# Altium PCB Fei-Fei.PcbDoc
Units mm, origin at the board's own origin, x right, y up, seen from the top; angles counter-clockwise.
Board outline 50 x 50 mm, 2 copper layers (Top Layer, Bottom Layer), stack 1.664 mm thick; 12 components, 6 nets, 41 pads, 1 vias.
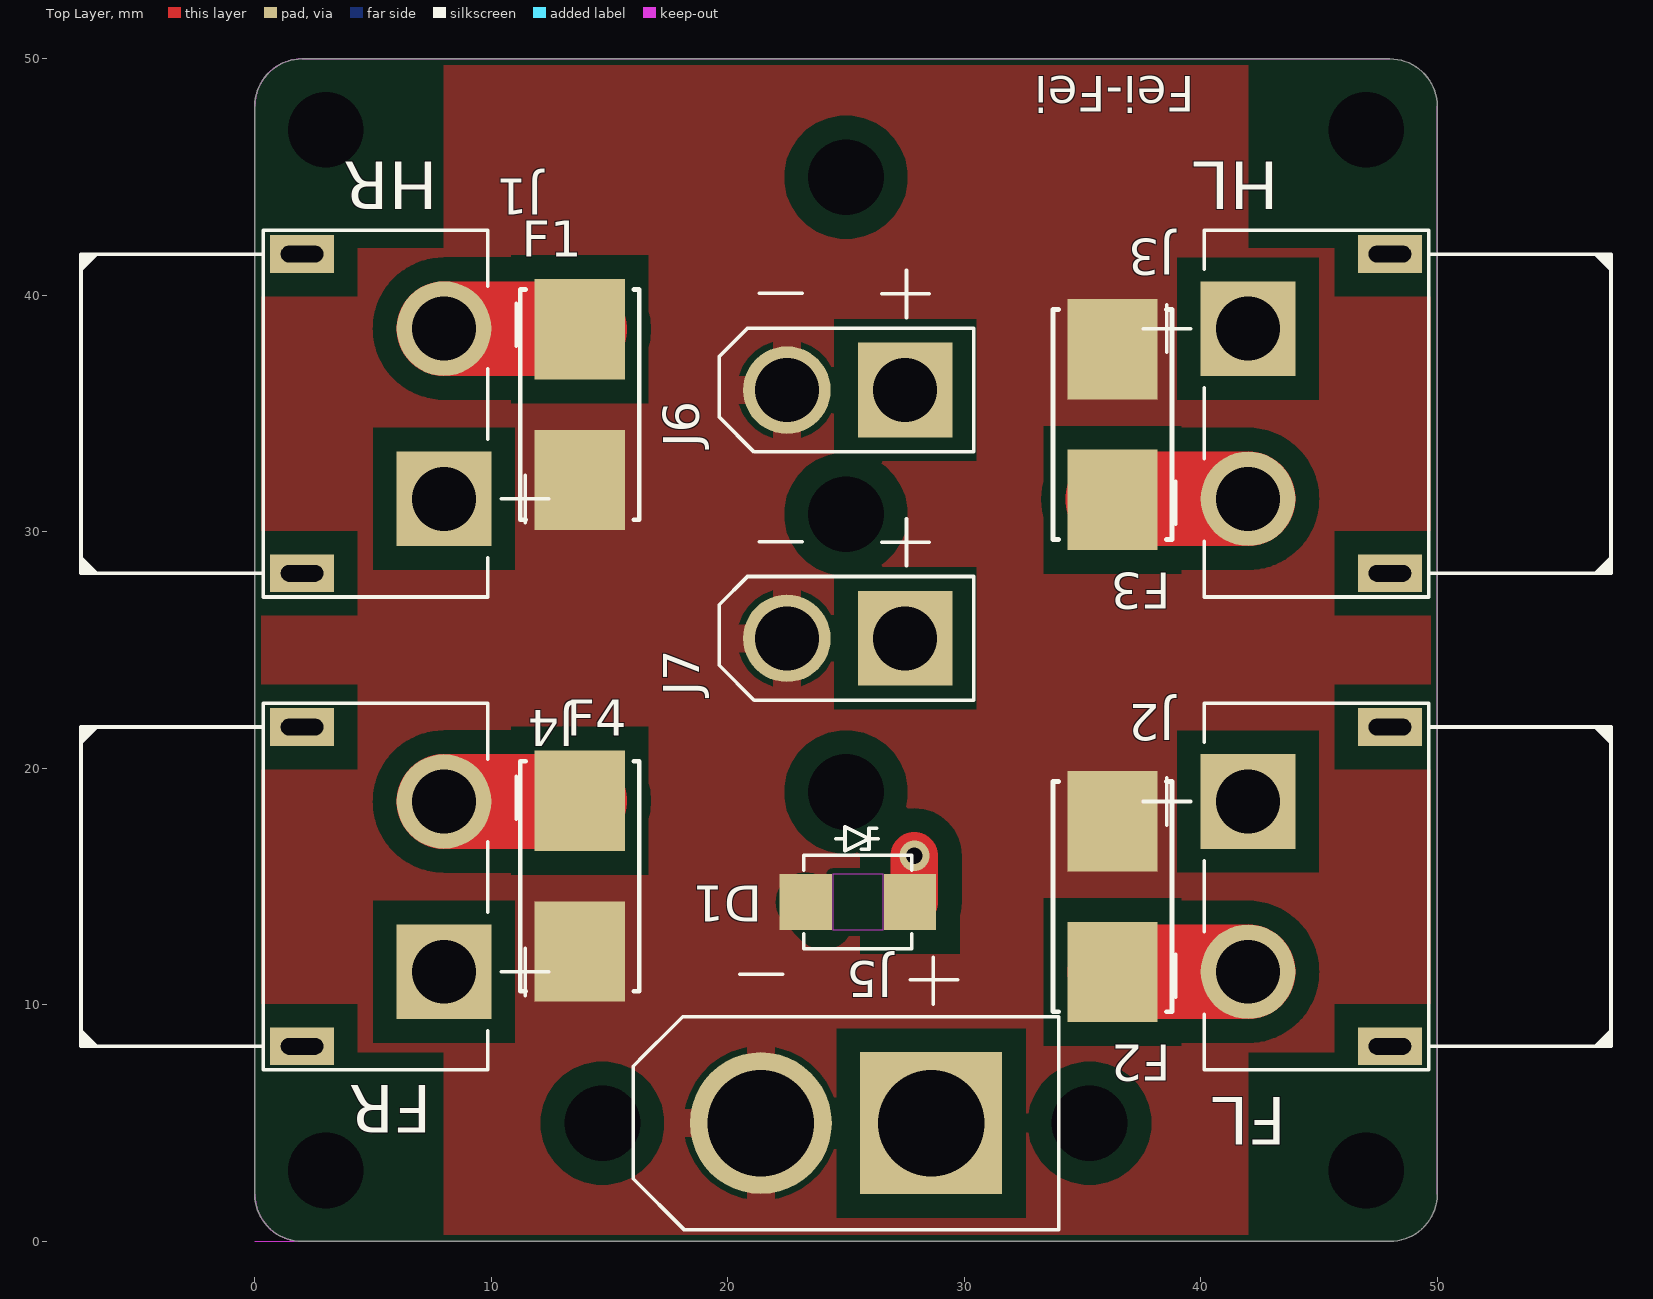
[diagram p0: Top Layer view]
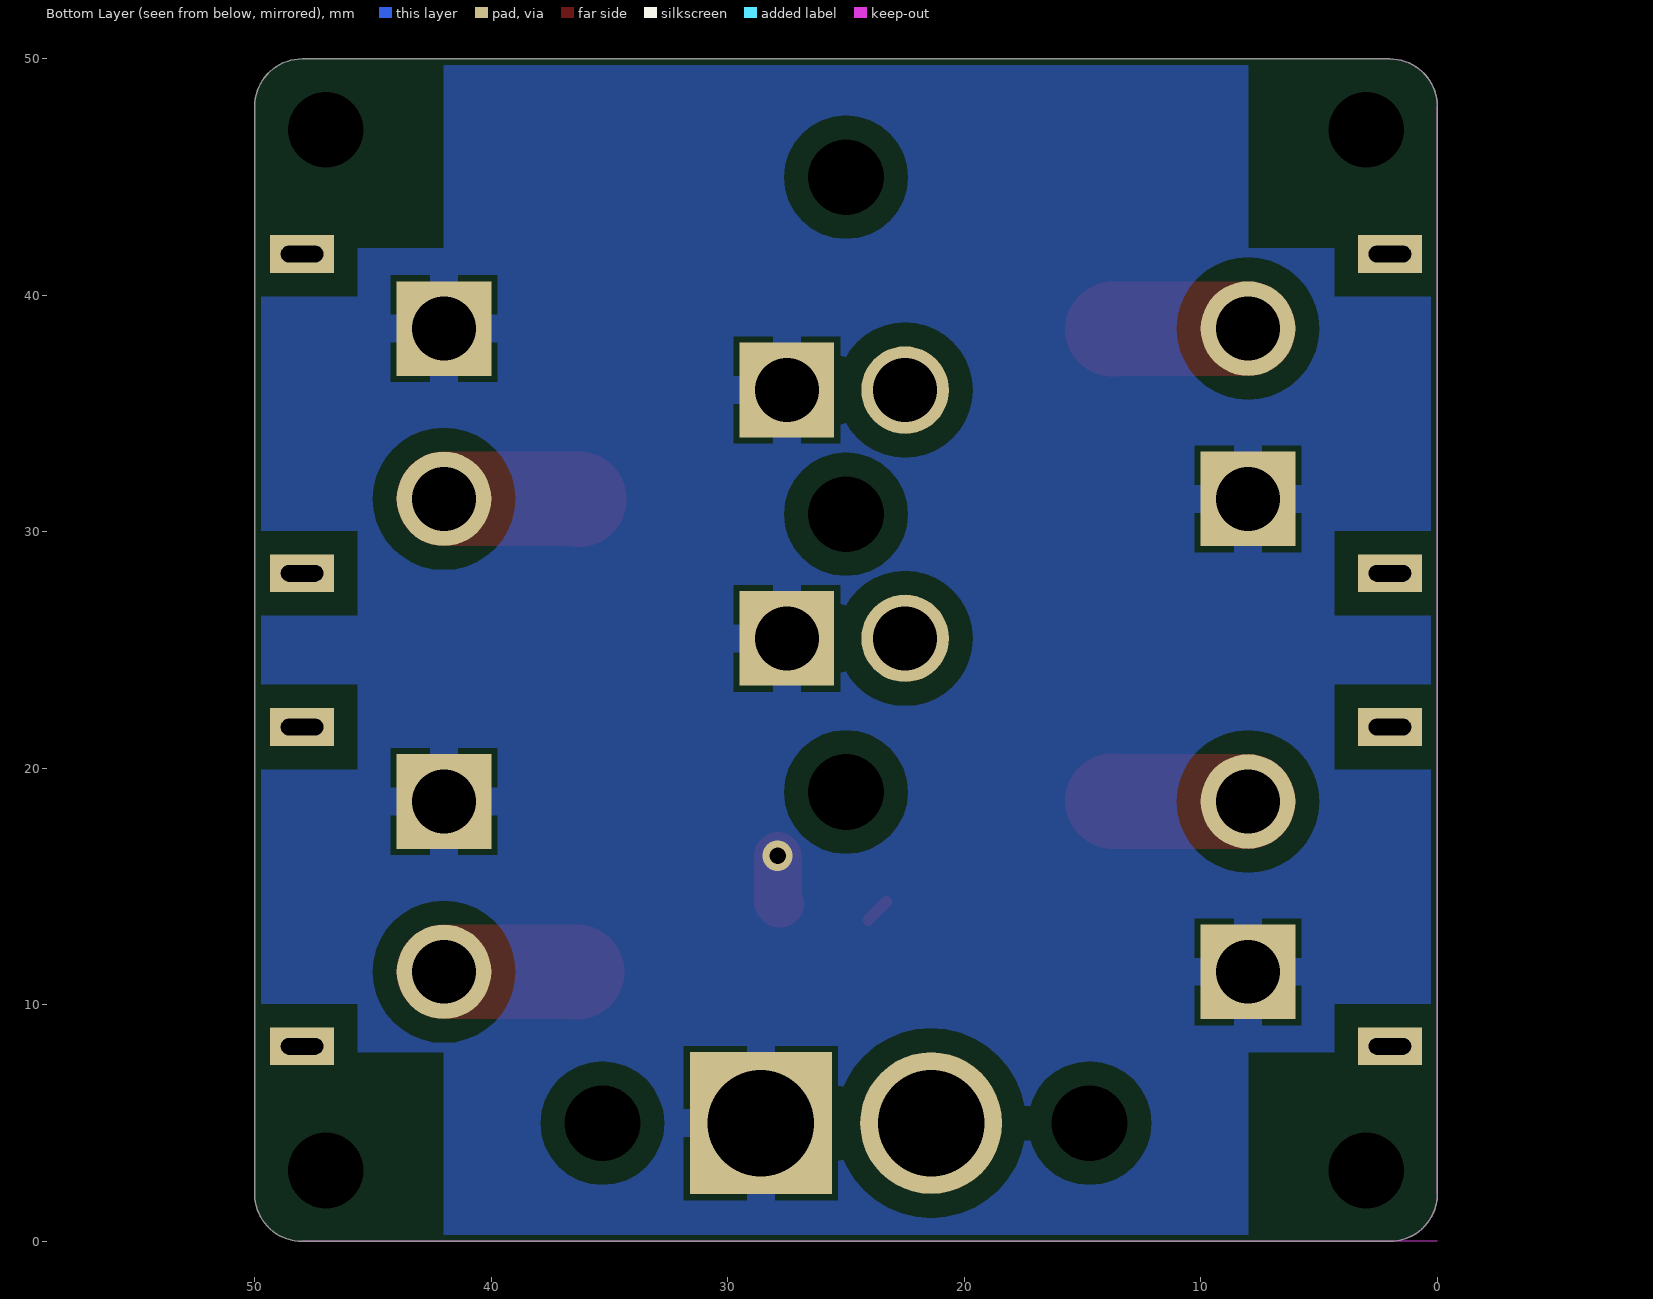
[diagram p1: Bottom Layer view, seen from below]
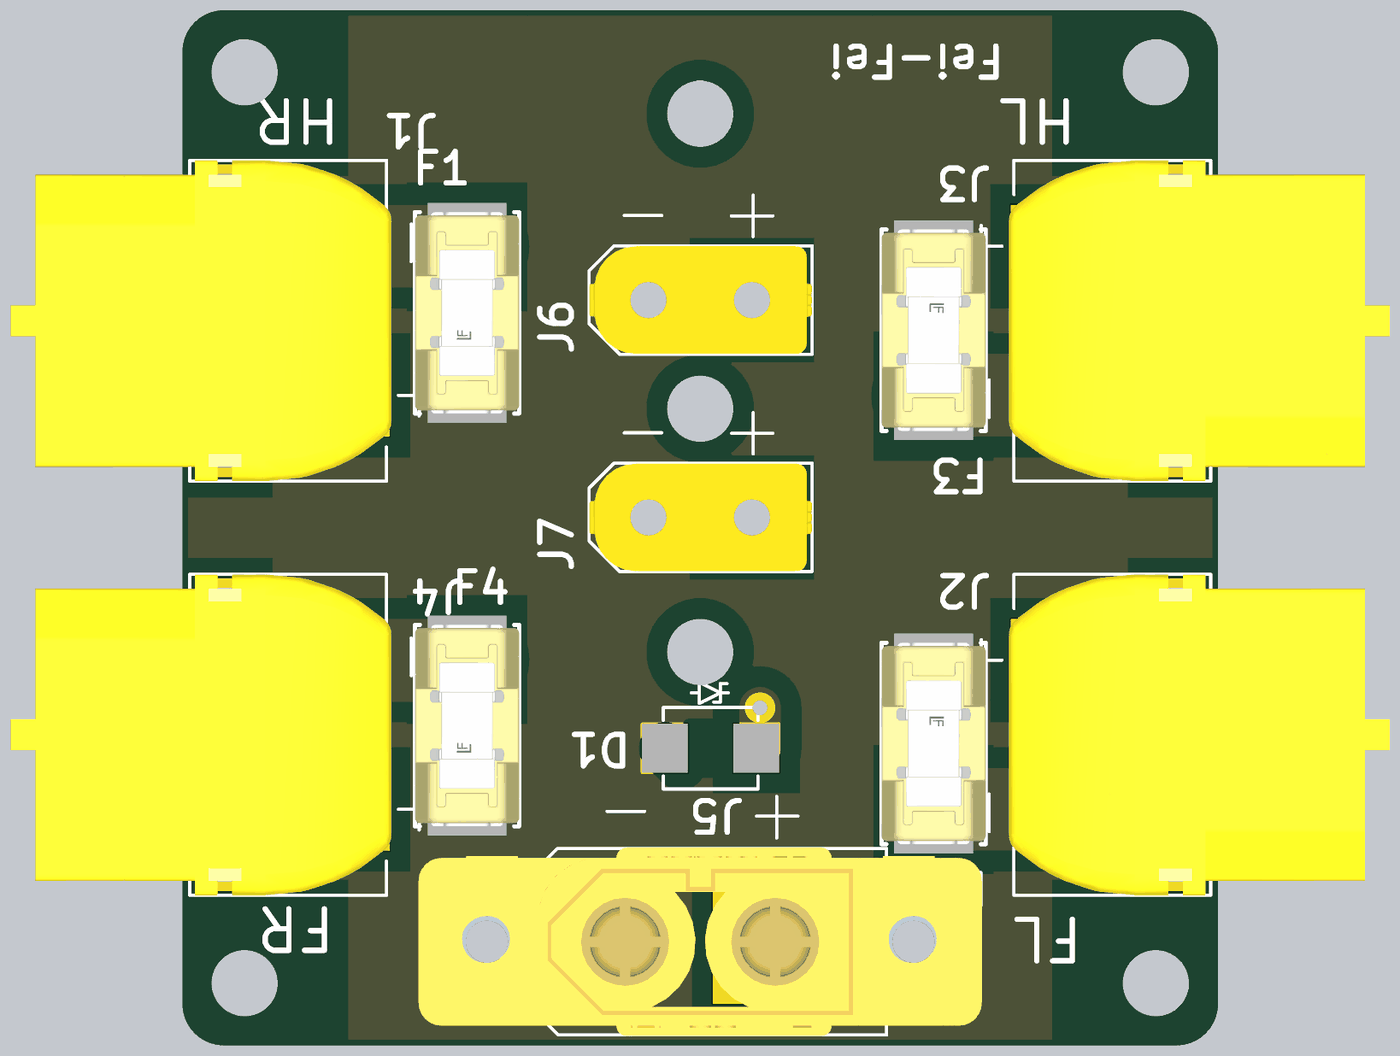
[diagram p2: 3D render of the assembled board from above, using the file's embedded part models]

## Layer stack, top to bottom
Top Solder: solder mask 0.0152, Taiyo-SM - Green, Dk 3.9
Top Layer: signal copper 0.07
Dielectric 1: prepreg 1.524, PP-018, Dk 4.3
Bottom Layer: signal copper 0.07
Bottom Solder: solder mask 0.0152, Taiyo-SM - Green, Dk 3.9

## Board outline
0,2 0,48 cw(c2,48) 2,50 48,50 cw(c48,48) 50,48 50,2 cw(c48,2) 48,0 2,0 cw(c2,2)

## Design rules (kind name [scope] priority, off if disabled: settings)
Clearance Clearance_Keepout [IsKeepOut] p1: gap=0.127 ignorepadtopadclearanceinfootprint=TRUE except(0.254: Arc-Arc Arc-Track Arc-Fill Arc-Poly Arc-Region Track-Track Track-Fill Track-Poly Track-Region Fill-Fill Fill-Poly Fill-Region Poly-Poly Poly-Region Region-Region Text-Text Text-Hole)
Clearance Clearance_48V [InNetClass('48V')] p2: gap=0.254 ignorepadtopadclearanceinfootprint=FALSE except(1.016: Arc-Fill Arc-Poly Arc-Region Track-Fill Track-Poly Track-Region THPad-Fill THPad-Poly THPad-Region Via-Fill Via-Poly Via-Region Fill-Fill Fill-Poly Fill-Region Poly-Poly Poly-Region Region-Region)
Clearance Clearance_diff_90ohm [InNet('USB_N') or InNet('USB_P')] p3: gap=0.254 ignorepadtopadclearanceinfootprint=FALSE except(0.145: Arc-Arc Arc-Track Track-Track; 0.2: Arc-SMDPad Track-SMDPad SMDPad-SMDPad; 0.635: Fill-Fill Fill-Poly Fill-Region Poly-Poly Poly-Region Region-Region)
Clearance Clearance_U3 [InComponent('U3') or InComponent('U2') or InComponent('U1')] p4: gap=0.254 ignorepadtopadclearanceinfootprint=FALSE except(0.178: SMDPad-SMDPad; 0.635: Fill-Fill Fill-Poly Fill-Region Poly-Poly Poly-Region Region-Region)
Clearance [All vs InNet('48V')] p5: gap=1 ignorepadtopadclearanceinfootprint=TRUE
Clearance Clearance_1 [All vs InNet('GND')] p6: gap=1 ignorepadtopadclearanceinfootprint=TRUE
DiffPairsRouting DiffPair_90ohm_DiffPairsRouting [All] p1: maxlimit=0.148 minlimit=0.146 mostfreqgap=0.147 toplayer_minwidth=0.131 toplayer_maxwidth=0.132 toplayer_prefwidth=0.132 bottomlayer_minwidth=0.131 bottomlayer_maxwidth=0.132 bottomlayer_prefwidth=0.132 maxuncoupledlength=12.7
DiffPairsRouting [All] p2: maxlimit=0.254 minlimit=0.254 mostfreqgap=0.254 toplayer_minwidth=0.381 toplayer_maxwidth=0.381 toplayer_prefwidth=0.381 bottomlayer_minwidth=0.381 bottomlayer_maxwidth=0.381 bottomlayer_prefwidth=0.381 maxuncoupledlength=12.7
HoleSize [All] p1: absolutevalues=TRUE maxlimit=2.7 minlimit=0.025 maxpercent=80.000 minpercent=20.000
MatchedLengths DiffPair_90ohm_MatchedLengths [All] p1: tolerance=0.635 checknetsindiffpair=TRUE checkdiffpairvsdiffpair=FALSE checkxsignals=FALSE checkothers=FALSE
MinimumSolderMaskSliver [All] p1: minsoldermaskwidth=0.089
PlaneClearance PlaneClearance_1 [All] p1: clearance=0.508
PlaneClearance [InPolygon] p2: clearance=1
PlaneConnect [All] p1: planeconnectstyle=Relief reliefexpansion=0.508 reliefentries=4 reliefconductorwidth=0.5 reliefairgap=1
PolygonConnect PolygonConnect_chassis [InNet('NetC7_2')] p1: connectstyle=Direct reliefconductorwidth=0.254 reliefentries=4 polygonreliefangle="90 Angle" airgapwidth=0.254
PolygonConnect [All] p2: thpad.connectstyle=Relief thpad.reliefconductorwidth=1.2 thpad.reliefentries=4 thpad.polygonreliefangle="90 Angle" thpad.airgapwidth=0.254 smdpad.connectstyle=Direct smdpad.reliefconductorwidth=0.508 smdpad.reliefentries=4 smdpad.polygonreliefangle="90 Angle" smdpad.airgapwidth=0.254 via.connectstyle=Direct via.reliefconductorwidth=0.254 via.reliefentries=4 via.polygonreliefangle="90 Angle" via.airgapwidth=0.254
RoutingVias [All] p1: holewidth=0.711 width=1.27 viastyle="Through Hole" minholewidth=0.305 minwidth=0.61 maxholewidth=0.711 maxwidth=1.27
SilkToSilkClearance [All] p1: silktosilkclearance=0.05
SilkToSolderMaskClearance [IsPad] p1: minsilkscreentomaskgap=0.05 clearancetoexposedcopper=TRUE
SolderMaskExpansion [All] p1: expansion=0.102 istentingtop=FALSE
Width [All] p1: maxlimit=6 minlimit=0.132 preferedwidth=2 minimp=50.000000 maximp=50.000000 favimp=50.000000
23 further rules are at their usual default settings.

## Components (designator, comment, footprint, x,y, rotation, side; value= is the part's Value field where it differs from the comment)
D1 "SMBJ58CA" DO-214AA 25.502,14.351 r0 top
F1 "0154007.DRT" FP-0154-MFG 13.741,35.382 r90 top
F2 "0154007.DRT" FP-0154-MFG 36.271,14.58 r270 top
F3 "0154007.DRT" FP-0154-MFG 36.271,34.544 r270 top
F4 "0154007.DRT" FP-0154-MFG 13.741,15.443 r90 top
J1 "XT60PW-F" XT60PW_F 8,35 r90 top locked
J2 "XT60PW-F" XT60PW_F 42,15 r270 top locked
J3 "XT60PW-F" XT60PW_F 42,35 r270 top locked
J4 "XT60PW-F" XT60PW_F 8,15 r90 top locked
J5 "XT60E-M" XT60E-M 25,5 r180 top locked
J6 "XT30U-F" XT30U-F 25,36 r180 top
J7 "XT30U-F" XT30U-F 25,25.5 r180 top

## Footprints (in the part's own frame and the unit in brackets; to place one, negate y for a bottom-side part, rotate by r counter-clockwise, add the part's x,y. Pads: shape width x height; smd on the part's side, far side on the other; paste and mask are expansions set on the pad)
DO-214AA [mil] "SMBJ54A-13-F  ; COLLECTED BY DN_TN - 22NOV21; CHECKED BY DN_QN - 24NOV21"
  rect 87x93 smd paste+0 mask+2.5: 1(-86.81,0) 2(86.81,0)
  Top Layer keep-out region: -42,-46 42,-46 42,46 -42,46
  silkscreen extent -90,-78 90,125
FP-0154-MFG [mil]
  rect 167x150 smd paste+0 mask+0: 1(-125.5,0) 2(125.5,0)
  silkscreen extent -192,-99 192,99, body extent -213,-103 213,103, height 10
XT30U-F [mm] "XT30U-F - Checked by MEK on 9/12/2023"
  rect 4x4 / inner round 4 / far side rect 4x4 hole 2.7 mask+0.064: 1(-2.5,0)
  round 3.7 hole 2.7 mask+0.064: 2(2.5,0)
  silkscreen extent -5.41,-5.06 5.36,2.62, body extent -5.39,-2.6 5.35,2.6, height 9.4
XT60E-M [mm] "XT60M  MEK - 12OCT21"
  rect 6x6 / inner round 6 / far side rect 6x6 hole 4.5 mask+0.064: 1(-3.6,0)
  round 6 hole 4.5 mask+0.064: 2(3.6,0)
  round 2 hole 3.2 unplated: 21(-10.3,0) 21(10.3,0)
  silkscreen extent -9,-7.02 9,4.5, body extent -13.6,-4.55 13.6,4.55, height 11.76
XT60PW_F [mm] "XT60PW_F  ; CHECKED BY DN_TN - 23NOV21, CHECKED BY DN_AV - 24NOV21"
  rect 4x4 / inner round 4 / far side rect 4x4 hole 2.7 mask+0.064: 1(-3.6,0)
  round 4 hole 2.7 mask+0.064: 2(3.6,0)
  rect 1.6x2.7 hole 1.8 slot 0.7 at 0 deg mask+0.064: 21(-6.75,6) 21(6.75,6)
  silkscreen extent -7.75,-4.43 7.75,15.35, body extent -7.75,-2.1 7.75,16.3, height 8.11

## Part data
D1: library part SMBJ48A-13-F, "Diode TVS Single Bi-Dir 58V 600W 2-Pin SMB", Manufacturer="Diodes Incorporated", Manufacturer Part Number=SMBJ54A-13-F, Supplier Part Number 1=SMBJ54A-FDICT-ND, Category="TVS Diodes", ComponentLink1Description=https://datasheet.ciiva.com/15143/getdatasheetpartid-57277-15143151.pdf?src-supplier=Verical, ComponentLink1URL=https://datasheet.ciiva.com/15143/getdatasheetpartid-57277-15143151.pdf?src-supplier=Verical, ComponentLink2Description=https://datasheet.ciiva.com/25624/0900766b810f4eeb-25624815.pdf?src-supplier=Rs, ComponentLink2URL=https://datasheet.ciiva.com/25624/0900766b810f4eeb-25624815.pdf?src-supplier=Rs, ComponentLink3Description=https://datasheet.ciiva.com/46427/1677318-46427999.pdf?src-supplier=Element14, ComponentLink3URL=https://datasheet.ciiva.com/46427/1677318-46427999.pdf?src-supplier=Element14, ComponentLink4Description=https://datasheet.ciiva.com/331/littelfuse-tvs-diode-smbj-datasheet-pdf-331664.pdf?src-supplier=Digi-Key, ComponentLink4URL=https://datasheet.ciiva.com/331/littelfuse-tvs-diode-smbj-datasheet-pdf-331664.pdf?src-supplier=Digi-Key, ComponentLink5Description=https://datasheet.ciiva.com/331/littelfuse-tvs-diode-smbj-datasheet-pdf-331665.pdf?src-supplier=Digi-Key, ComponentLink5URL=https://datasheet.ciiva.com/331/littelfuse-tvs-diode-smbj-datasheet-pdf-331665.pdf?src-supplier=Digi-Key, ComponentLink6Description=https://datasheet.ciiva.com/331/littelfuse-tvs-diode-smbj-datasheet-pdf-331666.pdf?src-supplier=Digi-Key, ComponentLink6URL=https://datasheet.ciiva.com/331/littelfuse-tvs-diode-smbj-datasheet-pdf-331666.pdf?src-supplier=Digi-Key, ComponentLink7Description=https://datasheet.ciiva.com/8062/littelfuse-tvs-diode-smbj-8062344.pdf?src-supplier=Element14, ComponentLink7URL=https://datasheet.ciiva.com/8062/littelfuse-tvs-diode-smbj-8062344.pdf?src-supplier=Element14, Pricing 2="3000=0.0728, 9000=0.07, 15000=0.0687, 30000=0.0671, 60000=0.0645 (USD)", RoHS=Yes, Stock 2=75000, Supplier 1=Digikey, Supplier 2="Future Electronics", Supplier Part Number 2=8076390
F1 F2 F3 F4: library part CMP-08605-000019-1, "FUSE BRD MNT 7A 72VAC 60VDC 2SMD", Fuse Current=7A, Manufacturer="Littelfuse Inc", Max Fuse Ac Voltage=72V, Max Fuse Dc Voltage=60V, Package=0154, Temperature="-55°C to +125°C", Temperature Range High=+125°C, Temperature Range Low=-55°C, Automotive=No, Category=Fuse, ComponentLink2Description=Datasheet, ComponentLink2URL=https://www.littelfuse.com/~/media/electronics/datasheets/fuses/littelfuse_fuse_154_154t_154l_154tl_datasheet.pdf.pdf, Device Class L1="Circuit Protection", Device Class L2=Fuses, Device Class L3=unset, Digikey Description="FUSE BRD MNT 7A 72VAC 60VDC 2SMD", Fuse Blow Speed=Slow, Height=3.81mm, Lead Free=Yes, Manufacturer Part Number=0154007.DRT, Mouser Description="Surface Mount Fuses ACS SMF OMNI-BLOK SB RoHS 7A", Octopart=https://octopart.com/0154007.drt-littelfuse-19644006, RoHS=TRUE
J1 J2 J3 J4 J6 J7: Manufacturer Link=https://www.tme.eu/gb/details/xt60pw-f/dc-power-connectors/amass/?brutto=1&currency=GBP&gclid=Cj0KCQjwz8emBhDrARIsANNJjS53ShuwMtc7PxX_PGoXGRRVbNHpUt3m1mLshKeAqDpjTqScIuL4RFoaApfkEALw_wcB

## Free pads (board coordinates)
  round 1.5 hole 3.2 unplated: 2(3,3) 2(3,47) 2(25,19) 2(25,30.75) 2(25,45) 2(47,3) 2(47,47)

## Via types
v1: diameter 1.27, hole 0.711, Top Layer to Bottom Layer, 1 vias

## Nets (pads, with @x,y where several pads share a name; then routed paths per layer and width w, separated by ;. In a path a pad name is that pad's centre, name@x,y a point inside that pad or via, vN(x,y) a via of type N, cw(c..) or ccw(c..) an arc to the next point about the centre after c; other vN are vias at no path point)
48V: D1.2 J1.1 J2.1 J3.1 J4.1 J5.1 J6.1 J7.1 | length 2.2
  Top Layer w0.381: D1.2 D1.2@27.783,14.275
  Top Layer w2: D1.2@27.783,14.275 27.822,14.275 27.889,14.342 v1(27.889,16.307)
GND: D1.1 F1.1 F2.1 F3.1 F4.1 J5.2 J6.2 J7.2 | length 1.1
  Top Layer w0.508: D1.1 D1.1@24.054,13.594
NetF1_2: F1.2 J1.2 | length 5.8
  Top Layer w4: J1.2 13.711,38.6 F1.2
NetF2_2: F2.2 J2.2 | length 6.9
  Top Layer w0.152: F2.2@36.373,11.392 F2.2@37.241,10.524
  Top Layer w4: F2.2@36.373,11.392 36.381,11.4 J2.2
NetF3_2: F3.2 J3.2 | length 5.8
  Top Layer w4: F3.2 36.271,31.4 J3.2
NetF4_2: F4.2 J4.2 | length 5.8
  Top Layer w4: J4.2 13.711,18.6 F4.2
pads on no net: J1.21 J2.21 J3.21 J4.21 J5.21

## Polygon pours and split planes (outlines as drawn)
48V on Bottom Layer "Bottom Layer-48V" (solid, remove dead copper, pour order 149): 0,42 8,42 8,50 42,50 42,42 50,42 50,8 42,8 42,0 8,0 8,8 0,8
GND on Top Layer "NONET_L-01_P-001" (solid, pour order 151): 0,42 8,42 8,50 42,50 42,42 50,42 50,8 42,8 42,0 8,0 8,8 0,8

## Keep-outs
Keep-Out Layer:
  lines w0.025: 0,0 48,0 ; 2,0 cw(c2,2) 0,2 0,48 cw(c2,48) 2,50 48,50 ; 50,2 50,48

## Silkscreen, mask and mechanical layers (free items; w line width, h text height)
Top Overlay:
  text "Fei-Fei" at 39.751,49.276 h1.5 r180
  text "HR" at 7.747,45.644 h2 r180
  text "HL" at 43.307,45.644 h2 r180
  text "FR" at 7.493,6.604 h2 r180
  text "FL" at 43.612,6.096 h2 r180
Mechanical 1:
  lines w0.025: 0,8.814 0,47.983 ; 0,2 ccw(c2,2) 2,0 48,0 ccw(c48,2) 50,2 50,48 ccw(c48,48) 48,50 2,50 ccw(c2,48) 0,48 0,2
Fab_notes:
  lines w0.381: 100.219,16.764 110.631,16.764 134.247,16.764 161.417,16.764 177.923,16.764 192.397,16.764 ; 100.219,19.812 110.631,19.812 134.247,19.812 161.417,19.812 177.923,19.812 192.397,19.812 ; 100.219,22.86 110.631,22.86 134.247,22.86 161.417,22.86 177.923,22.86 192.397,22.86 ; 100.219,25.908 110.631,25.908 134.247,25.908 161.417,25.908 177.923,25.908 192.397,25.908 ; 100.219,28.956 110.631,28.956 134.247,28.956 161.417,28.956 177.923,28.956 192.397,28.956 ; 100.219,32.004 110.631,32.004 134.247,32.004 161.417,32.004 177.923,32.004 192.397,32.004 ; 100.219,35.052 192.397,35.052 ; 110.631,38.1 110.631,13.716 ; 134.247,38.1 134.247,13.716 ; 161.417,38.1 161.417,13.716 ; 177.923,38.1 177.923,13.716 ; 110.631,13.716 100.219,13.716 100.219,38.1 192.397,38.1 192.397,13.716 177.923,13.716 ; 110.631,13.716 134.247,13.716 ; 134.247,13.716 161.417,13.716 ; 161.417,13.716 177.923,13.716
  text "FAB NOTES: UNLESS OTHERWISE SPECIFIED." at -0.533,151.181 h2
  text "1.THE FINISHED PRINTED CIRCUIT BOARD SHALL MEET THE REQUIREMENTS OF  /   IPC-A-600, CLASS 3, AND ROHS COMPLIANCE." at -0.483,141.122 h2
  text "2.CONFIGURATION OF THE PRINTED CIRCUIT BOARD NOT SPECIFICALLY  /   DIMENSIONED ON THE DRAWING SHALL BE CONTROLLED BY THE GERBER DATA." at -0.584,133.325 h2
  text "3.MATERIAL: .062 INCHES  +/-10% THICK, NEMA GRADE, GLASS EPOXY, NATURAL COLOR /   THIS PRINTED CIRCUIT BOARD WILL BE 2 LAYERS." at -0.483,126.136 h2
  text "4.PLATING: ALL HOLES AND CONDUCTIVE SURFACES SHALL BE PLATED WITH .0012  /   INCHES COPPER MINIMUM. COPPER TO BE MEASURED AT THE CENTER OF VIA HOLE." at -0.584,118.161 h2
  text "5.ALL HOLE'S DIMENSIONS ARE STATED AS FINISHED HOLE SIZES." at -0.33,112.446 h2
  text "6.FABRICATION TOLERANCES: END PRODUCT TRACE WIDTHS AND LANDS SHALL NOT VARY  /   MORE THAN THE SMALLER OF .002 INCHES OR 20% OF THE TRACE WIDTH FROM THE GERBER DATA" at -0.787,102.87 h2
  text "7.SOLDER MASK: PHOTO-IMAGED LIQUID POLYMER ON BOTH SIDES OF BOARD IN /   ACCORDANCE WITH IPC-SM-840. TYPE B, CLASS 3, OVER BARE COPPER. /   SOLDER MASK COLOR TO BE GREEN." at -0.787,92.05 h2
  text "8.COMPONENT MARKING: SILKSCREEN BOTH SIDES WITH WHITE, NON-CONDUCTIVE /   EPOXY INK. LANDS AND EXPOSED PLATED AREAS TO BE FREE OF INK." at -0.483,83.972 h2
  text "9.BOW AND TWIST: SHALL NOT EXCEED .007 INCHES PER INCH." at -0.279,78.308 h2
  text "10.ELECTRICAL TEST: THE PRINTED WIRING BOARD SHALL BE ELECTRICALLY TESTED /   FOR OPENS AND SHORTS. THE RESULTS OF THE ELECTRICAL TEST SHALL BE /   DOCUMENTED AND DELIVERED ALONG WITH EACH LOT." at -1.219,65.684 h2
  text "Layer" at 101.997,35.814 h1.52
  text "Name" at 112.409,35.814 h1.52
  text "Material" at 136.025,35.814 h1.52
  text "Thickness" at 163.195,35.814 h1.52
  text "Constant" at 179.701,35.814 h1.52
  text "Top Overlay" at 112.409,32.766 h1.52
  text "Top Solder" at 112.409,29.718 h1.52
  text "Taiyo-SM - Green" at 136.025,29.718 h1.52
  text "0.60mil" at 163.195,29.718 h1.52
  text "3.9" at 179.701,29.718 h1.52
  text "1" at 101.997,26.67 h1.52
  text "Top Layer" at 112.409,26.67 h1.52
  text "CF-005" at 136.025,26.67 h1.52
  text "2.76mil" at 163.195,26.67 h1.52
  text "Dielectric 1" at 112.409,23.622 h1.52
  text "PP-018" at 136.025,23.622 h1.52
  text "60.00mil" at 163.195,23.622 h1.52
  text "4.3" at 179.701,23.622 h1.52
  text "2" at 101.997,20.574 h1.52
  text "Bottom Layer" at 112.409,20.574 h1.52
  text "CF-005" at 136.025,20.574 h1.52
  text "2.76mil" at 163.195,20.574 h1.52
  text "Bottom Solder" at 112.409,17.526 h1.52
  text "Taiyo-SM - Green" at 136.025,17.526 h1.52
  text "0.60mil" at 163.195,17.526 h1.52
  text "3.9" at 179.701,17.526 h1.52
  text "Bottom Overlay" at 112.409,14.478 h1.52
  text "Total board thickness:" at 101.997,11.43 h1.52
  text "66.71mil" at 163.195,11.43 h1.52
Outline:
  lines w0: 2,50 48,50
  lines w0.025: 2,0 cw(c2,2) 0,2 0,48 cw(c2,48) 2,50 ; 50,2 50,48
  lines w0.254: 0,2 ccw(c2,2) 2,0 48,0 ccw(c48,2) 50,2 50,48 ccw(c48,48) 48,50 2,50 ccw(c2,48) 0,48 0,2

## Dimensions
0,0 to 2,50 on Fab_notes